# EAGLE board protoBoardHB (EAGLE 9.2.2)
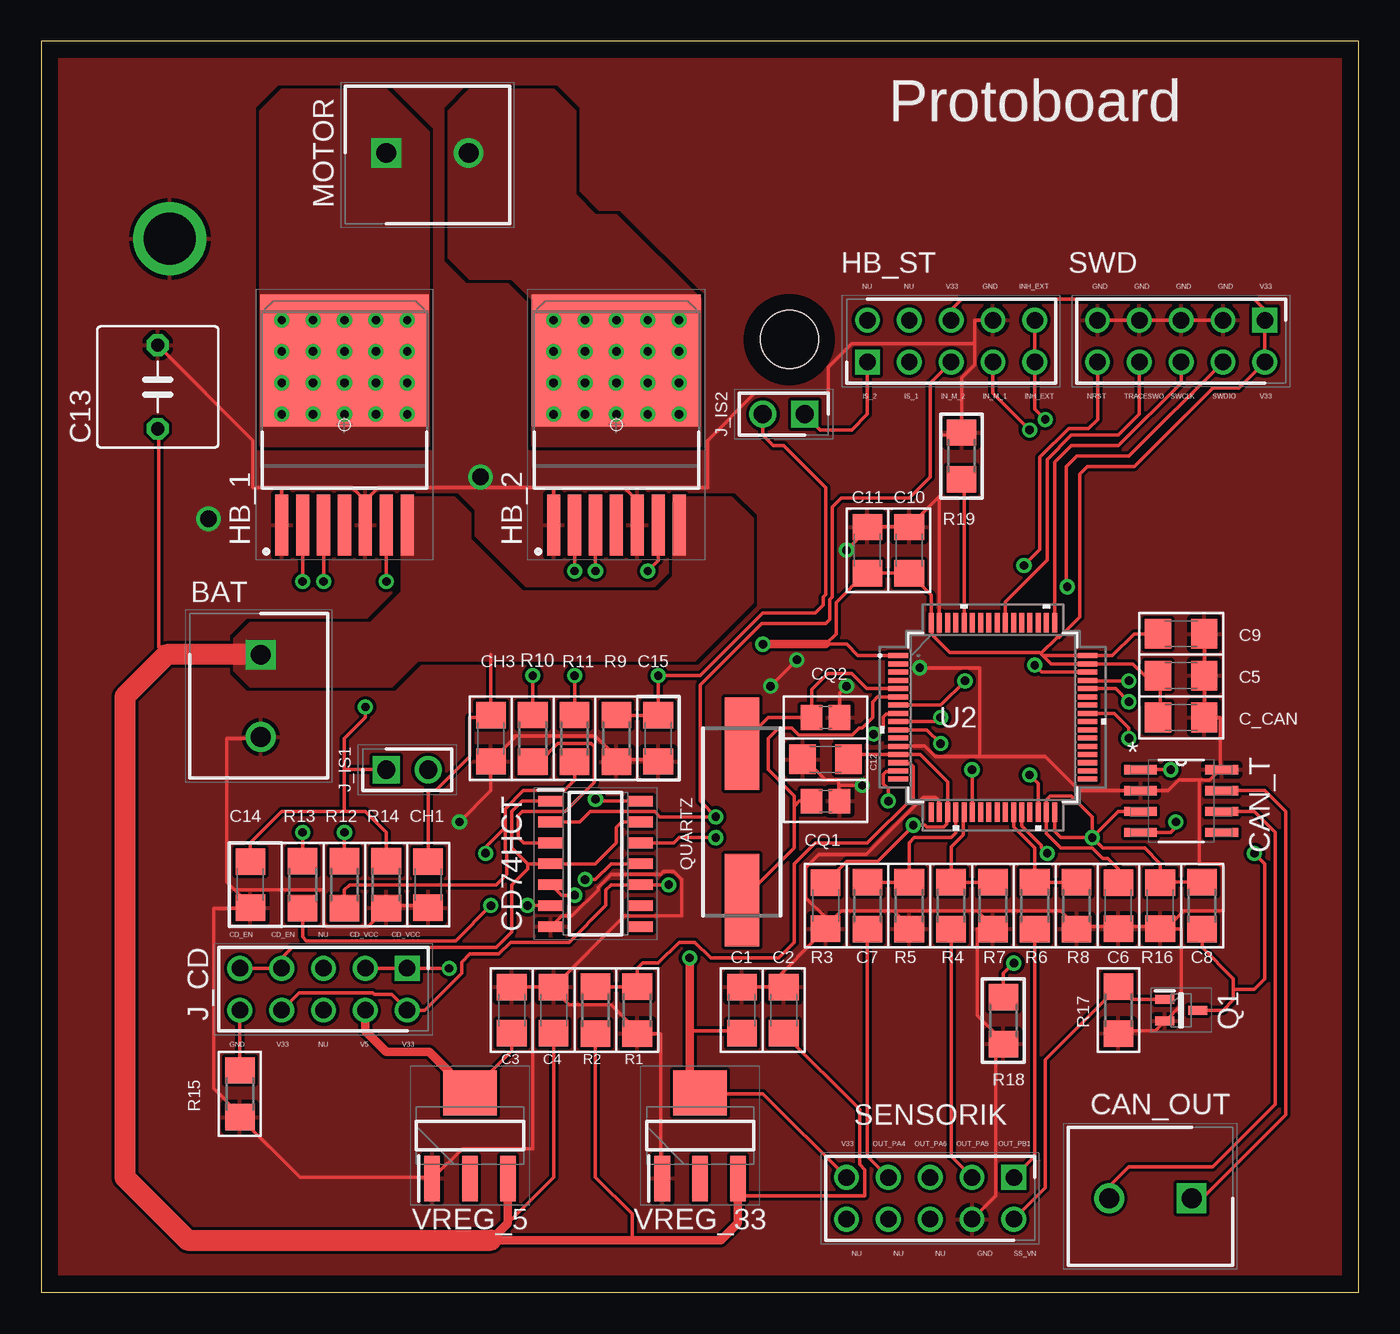
[diagram p0: board, top side]
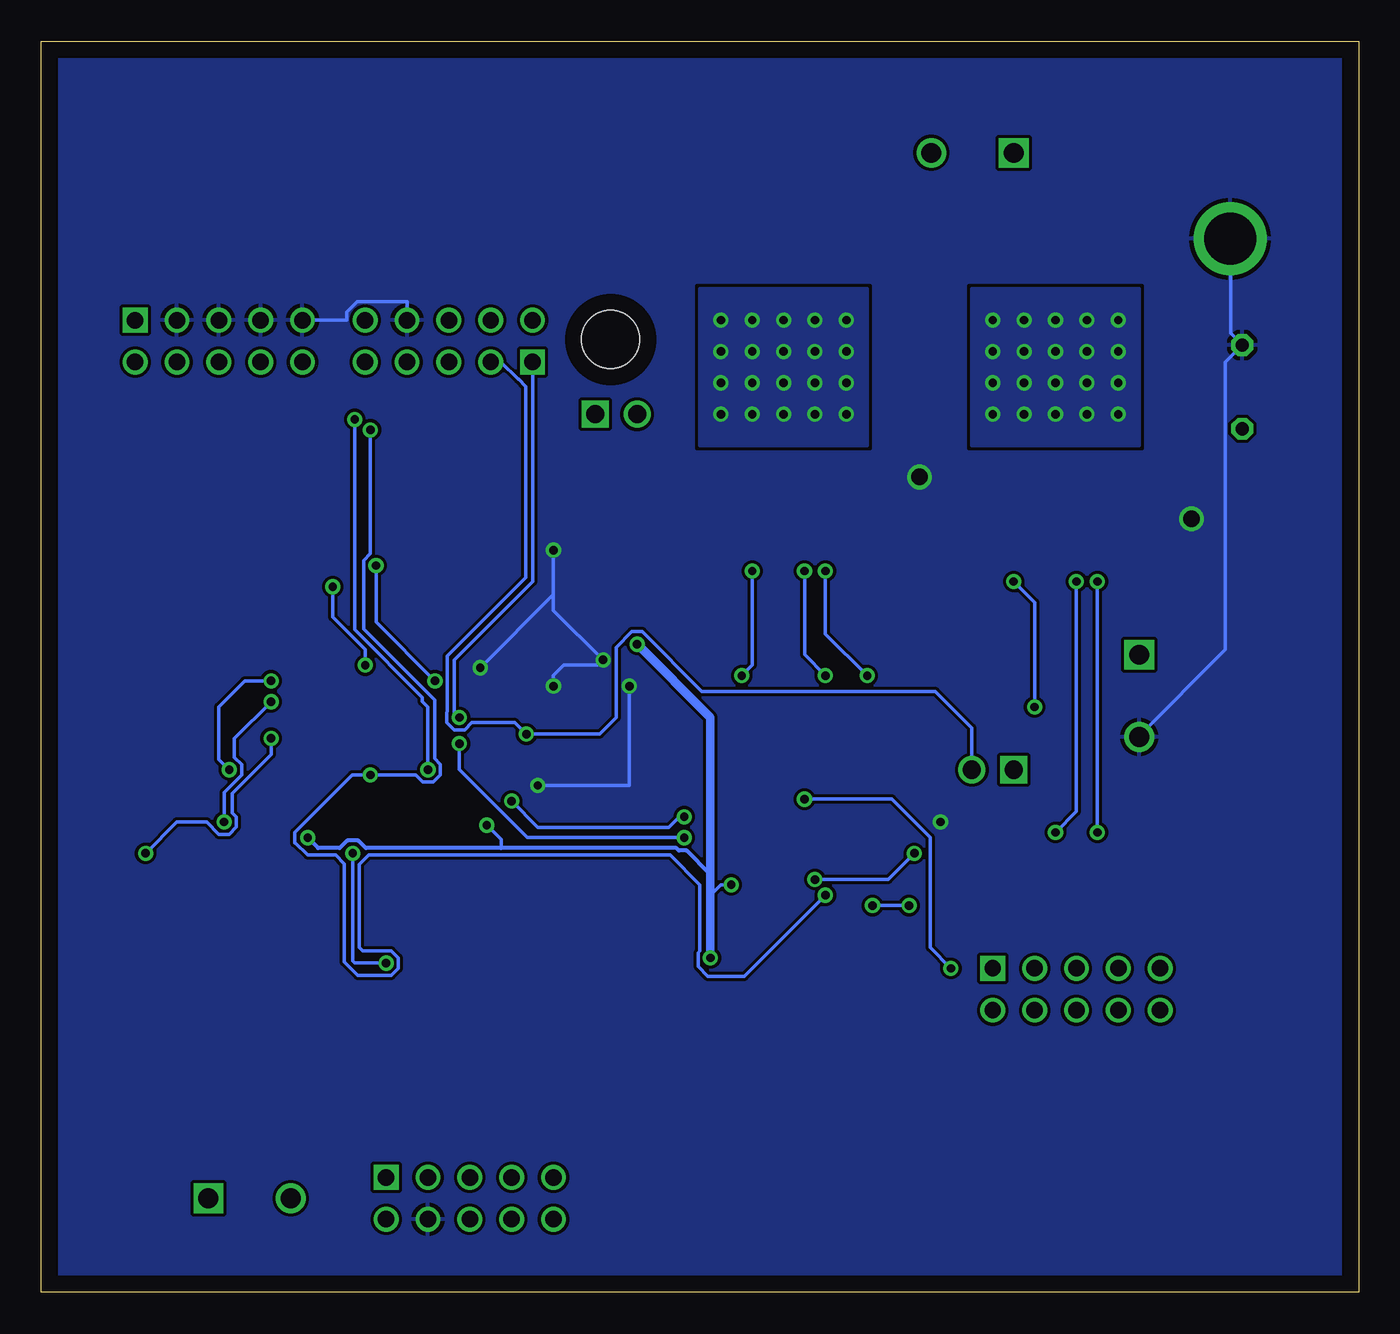
[diagram p1: board, bottom side, seen from below]

Size 80 x 76 mm. Coordinates in mm from the lower left corner, seen from the top.
Outline: 0,0 80,0 80,76 0,76 0,0
Copper layers (1*16): Top 0.07mm / dielectric 1.55mm / Bottom 0.07mm
Design rules "default *": minimum track width 6mil, minimum drill 0.35mm, track to track 0.19mm, track to pad 0.19mm, pad to pad 0.19mm, via to via 0.19mm, smd to smd 0.19mm, copper to edge 40mil, drill to drill 6mil, minimum pad ring 10mil, minimum via ring 8mil, stop-mask expansion 4mil, vias tented up to drill 0mil, thermal gap 10mil
Net classes: 0 default: width 0.2 mm, drill 0.508 mm; 1 V12: width 0.6 mm, drill 0.8 mm
Holes 3.5 mm at 45.43,57.88

## Footprints (pad centres in the part's own frame; a part is rotated, then mirrored left to right if it is on the bottom)
SHDR2W100P0X500_1X2_1000X820X1 = drill 1.2 pad 1.8 square: 1 0,0 | drill 1.2 pad 1.8: 2 5,0
C1206 = smd 1.6 x 1.8: 1 -1.4,0; 2 1.4,0
C050-075X075 = drill 0.813 octagon: 1 -2.54,0; 2 2.54,0
SOIC127P600X175-8N = smd 1.981 x 0.559: 1 -2.464,1.905; 2 -2.464,0.635; 3 -2.464,-0.635; 4 -2.464,-1.905; 5 2.464,-1.905; 6 2.464,-0.635; 7 2.464,0.635; 8 2.464,1.905
SOIC127P600X175-14N = smd 1.525 x 0.65: 1 -2.712,3.81; 2 -2.712,2.54; 3 -2.712,1.27; 4 -2.712,0; 5 -2.712,-1.27; 6 -2.712,-2.54; 7 -2.712,-3.81; 8 2.712,-3.81; 9 2.712,-2.54; 10 2.712,-1.27; 11 2.712,0; 12 2.712,1.27; 13 2.712,2.54; 14 2.712,3.81
C0805 = smd 1.3 x 1.5: 1 -0.85,0; 2 0.85,0
TO127P1500X440-8N = smd 3.7 x 0.8: 1 -6.1,3.81; 2 -6.1,2.54; 3 -6.1,1.27; 4 -6.1,0; 5 -6.1,-1.27; 6 -6.1,-2.54; 7 -6.1,-3.81 | smd 8 x 10.25: 8 3.9,0
HDRV10W80P254_2X5_1270X508X864 = drill 1 pad 1.5 square: 1 0,0 | drill 1 pad 1.5: 2 0,2.54; 3 2.54,0; 4 2.54,2.54; 5 5.08,0; 6 5.08,2.54; 7 7.62,0; 8 7.62,2.54; 9 10.16,0; 10 10.16,2.54
HDRV2W64P0X254_1X2_508X254X864 = drill 1.1 pad 1.65 square: 1 0,0 | drill 1.1 pad 1.65: 2 2.54,0
BEAGLEBONEBLACK_MOUNTING_HOLE = drill 3.175 pad 4.445: P$1 0,0
SOT65P220X100-3N = smd 1.15 x 0.55: 1 -1,0.65; 2 -1,-0.65; 3 1,0
ABLS-12.000MHZ-B2 = smd 5.6 x 2.1: 1 -4.75,0; 2 4.75,0
R1206 = smd 1.6 x 1.803: 1 -1.422,0; 2 1.422,0
LQFP64-10X10MM = smd 1.194 x 0.305: 1 -5.75,3.75; 2 -5.75,3.25; 3 -5.75,2.75; 4 -5.75,2.25; 5 -5.75,1.75; 6 -5.75,1.25; 7 -5.75,0.75; 8 -5.75,0.25; 9 -5.75,-0.25; 10 -5.75,-0.75; 11 -5.75,-1.25; 12 -5.75,-1.75; 13 -5.75,-2.25; 14 -5.75,-2.75; 15 -5.75,-3.25; 16 -5.75,-3.75; 33 5.75,-3.75; 34 5.75,-3.25; 35 5.75,-2.75; 36 5.75,-2.25; 37 5.75,-1.75; 38 5.75,-1.25; 39 5.75,-0.75; 40 5.75,-0.25; 41 5.75,0.25; 42 5.75,0.75; 43 5.75,1.25; 44 5.75,1.75; 45 5.75,2.25; 46 5.75,2.75; 47 5.75,3.25; 48 5.75,3.75 | smd 0.305 x 1.194: 17 -3.75,-5.75; 18 -3.25,-5.75; 19 -2.75,-5.75; 20 -2.25,-5.75; 21 -1.75,-5.75; 22 -1.25,-5.75; 23 -0.75,-5.75; 24 -0.25,-5.75; 25 0.25,-5.75; 26 0.75,-5.75; 27 1.25,-5.75; 28 1.75,-5.75; 29 2.25,-5.75; 30 2.75,-5.75; 31 3.25,-5.75; 32 3.75,-5.75; 49 3.75,5.75; 50 3.25,5.75; 51 2.75,5.75; 52 2.25,5.75; 53 1.75,5.75; 54 1.25,5.75; 55 0.75,5.75; 56 0.25,5.75; 57 -0.25,5.75; 58 -0.75,5.75; 59 -1.25,5.75; 60 -1.75,5.75; 61 -2.25,5.75; 62 -2.75,5.75; 63 -3.25,5.75; 64 -3.75,5.75
SOT230P700X180-4N = smd 2.75 x 0.95: 1 -2.6,2.3; 2 -2.6,0; 3 -2.6,-2.3 | smd 2.75 x 3.25: 4 2.6,0

## Placement (x,y rotation side)
BAT  282836-2  [SHDR2W100P0X500_1X2_1000X820X1]  13.34,38.73 270 top
C1  4.7uF  [C1206]  42.55,17.14 90 top
C2  1uF  [C1206]  45.09,17.14 90 top
C3  4.7uF  [C1206]  28.57,17.14 270 top
C4  1uF  [C1206]  31.11,17.14 270 top
C5  2.2uF  [C1206]  69.22,37.47 0 top
C6  2.2uF  [C1206]  65.41,23.5 270 top
C7  100nF  [C1206]  47.62,23.5 270 top
C8  100nF  [C1206]  67.94,23.5 270 top
C9  100nF  [C1206]  69.22,40.01 0 top
C10  100nF  [C1206]  52.7,45.09 90 top
C11  4.7nF  [C1206]  50.16,45.09 90 top
C12  100nF  [C1206]  47.62,32.38 180 top
C13  470uF  [C050-075X075]  7.08,55 90 top
C14  1nF  [C1206]  12.7,24.77 270 top
C15  1nF  [C1206]  37.47,33.66 270 top
C_CAN  100nF  [C1206]  69.22,34.92 0 top
CAN_OUT  282836-2  [SHDR2W100P0X500_1X2_1000X820X1]  69.85,5.71 180 top
CAN_T  SN65HVD230QD  [SOIC127P600X175-8N]  69.22,29.84 0 top
CD74HCT  CD74HCT125M  [SOIC127P600X175-14N]  33.66,26.04 0 top
CH1  0.47uF  [C1206]  23.5,24.77 270 top
CH3  0.47uF  [C1206]  27.3,33.66 270 top
CQ1  22pF  [C0805]  47.62,29.84 0 top
CQ2  22pF  [C0805]  47.62,34.92 0 top
HB_1  BTN8982TA  [TO127P1500X440-8N]  18.41,52.7 90 top
HB_2  BTN8982TA  [TO127P1500X440-8N]  34.92,52.7 90 top
HB_ST  M20-9980545  [HDRV10W80P254_2X5_1270X508X864]  50.16,56.52 0 top
J_CD  M20-9980545  [HDRV10W80P254_2X5_1270X508X864]  22.23,19.68 180 top
J_IS1  M20-9990246  [HDRV2W64P0X254_1X2_508X254X864]  20.95,31.75 0 top
J_IS2  M20-9990246  [HDRV2W64P0X254_1X2_508X254X864]  46.35,53.34 180 top
MGT1  BEAGLEBONEBLACK_MOUNTING_HOLE  [BEAGLEBONEBLACK_MOUNTING_HOLE]  7.81,64 0 top
MOTOR  282836-2  [SHDR2W100P0X500_1X2_1000X820X1]  20.95,69.22 0 top
Q1  SMMBT3904WT1G  [SOT65P220X100-3N]  69.22,17.14 0 top
QUARTZ  ABLS-8.000MHZ-K4T  [ABLS-12.000MHZ-B2]  42.55,28.57 90 top
R1  [R1206]  36.2,17.14 270 top
R2  [R1206]  33.66,17.14 90 top
R3  [R1206]  50.16,23.5 90 top
R4  [R1206]  52.7,23.5 270 top
R5  [R1206]  55.24,23.5 90 top
R6  [R1206]  57.78,23.5 270 top
R7  [R1206]  60.33,23.5 90 top
R8  [R1206]  62.87,23.5 270 top
R9  1k  [R1206]  34.92,33.66 90 top
R10  10K  [R1206]  29.84,33.66 90 top
R11  10K  [R1206]  32.38,33.66 90 top
R12  10K  [R1206]  18.41,24.77 90 top
R13  10K  [R1206]  15.88,24.77 90 top
R14  1k  [R1206]  20.95,24.77 90 top
R15  1K  [R1206]  12.06,12.06 90 top
R16  100K  [R1206]  70.48,23.5 270 top
R17  7.5K  [R1206]  65.41,17.14 270 top
R18  1k  [R1206]  58.42,16.51 90 top
R19  1k  [R1206]  55.88,50.8 270 top
SENSORIK  M20-9980545  [HDRV10W80P254_2X5_1270X508X864]  59.05,6.99 180 top
SWD  M20-9980545  [HDRV10W80P254_2X5_1270X508X864]  74.3,59.05 180 top
U2  STM32F4X5RG  [LQFP64-10X10MM]  57.78,34.92 0 top
VREG_5  LDL1117S50R  [SOT230P700X180-4N]  26.04,9.53 90 top
VREG_33  LDL1117S33R  [SOT230P700X180-4N]  40.01,9.53 90 top

## Library data of the parts
BAT CAN_OUT MOTOR = SamacSys_Parts; DESCRIPTION: TERMINAL BLOCK, PCB MOUNT, SIDE WIRE ENTRY, STACKING , 5.00mm PITCH; HEIGHT: 10.2mm; MANUFACTURER_NAME: TE Connectivity; MANUFACTURER_PART_NUMBER: 282836-2; MOUSER_PART_NUMBER: 571-2828362
C1-C15 C_CAN CH1 CH3 CQ1 CQ2 R1-R19 = adafruit
CAN_T = ADP_Components; MF: TEXAS INSTRUMENTS; MPN: SN65HVD230QD..; OC_FARNELL: 1648752; OC_NEWARK: 75C7746; PACKAGE: SOIC-8; SUPPLIER: Texas Instruments
CD74HCT = SamacSys_Parts; DESCRIPTION: High Speed CMOS Logic Quad Buffers with 3-State Outputs; HEIGHT: 1.75mm; MANUFACTURER_NAME: Texas Instruments; MANUFACTURER_PART_NUMBER: CD74HCT125M; MOUSER_PART_NUMBER: 595-CD74HCT125M
HB_1 HB_2 = SamacSys_Parts; DESCRIPTION: New Infineon BTN8982TA Motor Driver,, 7-Pin TO-263-7-1; HEIGHT: 4.4mm; MANUFACTURER_NAME: Infineon; MANUFACTURER_PART_NUMBER: BTN8982TA; MOUSER_PART_NUMBER: 726-BTN8982TA
HB_ST SWD = SamacSys_Parts; DESCRIPTION: M20 Header, Pin, Dil, Vertical, 5+5 W HARWIN M20 Series, 2.54mm Pitch 10 Way 2 Row Straight Pin Header, Through Hole, Solder Termination; HEIGHT: 8.64mm; MANUFACTURER_NAME: HARWIN; MANUFACTURER_PART_NUMBER: M20-9980545; MF: HARWIN; MOUSER_PART_NUMBER: 855-M20-9980545; MPN: M20-9980545; OC_FARNELL: 1022235
J_CD SENSORIK = SamacSys_Parts; DESCRIPTION: M20 Header, Pin, Dil, Vertical, 5+5 W HARWIN M20 Series, 2.54mm Pitch 10 Way 2 Row Straight Pin Header, Through Hole, Solder Termination; HEIGHT: 8.64mm; MANUFACTURER_NAME: HARWIN; MANUFACTURER_PART_NUMBER: M20-9980545; MOUSER_PART_NUMBER: 855-M20-9980545
J_IS1 J_IS2 = SamacSys_Parts; DESCRIPTION: HARWIN M20-9990246. Board-To-Board Connector, Straight, 2.54 mm, 2 Contacts, Header, M20 Series, Through Hole; HEIGHT: 8.64mm; MANUFACTURER_NAME: HARWIN; MANUFACTURER_PART_NUMBER: M20-9990246; MOUSER_PART_NUMBER: 855-M20-9990246
MGT1 = BeagleBone_Black_Wireless
Q1 = SamacSys_Parts; DESCRIPTION: ON SEMICONDUCTOR - SMMBT3904WT1G - TRANSISTOR, AEC-Q101, NPN, 40V, SOT-323; HEIGHT: 1mm; MANUFACTURER_NAME: ON Semiconductor; MANUFACTURER_PART_NUMBER: SMMBT3904WT1G; MOUSER_PART_NUMBER: 863-SMMBT3904WT1G
QUARTZ = SamacSys_Parts; DESCRIPTION: ABRACON - ABLS-8.000MHZ-K4T - CRYSTAL, 8MHZ, 18PF, HC-49US; HEIGHT: mm; MANUFACTURER_NAME: ABRACON; MANUFACTURER_PART_NUMBER: ABLS-8.000MHZ-K4T; MF: ABRACON; MOUSER_PART_NUMBER: 815-ABLS-8.0MK4-T; MPN: ABLS-8.000MHZ-K4T; OC_FARNELL: 2467758
U2 = ADP_Components; MANUFACTURER_PART_NUMBER: STM32F4X5RG; OC_FARNELL: unknown; VENDOR: STMicroelectronics
VREG_5 = SamacSys_Parts; DESCRIPTION: STMICROELECTRONICS - LDL1117S50R - LDO, FIXED, 5V, 1.2A, SOT-223-3; HEIGHT: 1.8mm; MANUFACTURER_NAME: STMicroelectronics; MANUFACTURER_PART_NUMBER: LDL1117S50R; MF: STMICROELECTRONICS; MOUSER_PART_NUMBER: 511-LDL1117S50R; MPN: LDL1117S50R; OC_FARNELL: 2729709
VREG_33 = SamacSys_Parts; DESCRIPTION: STMICROELECTRONICS - LDL1117S33R - LDO, FIXED, 3.3V, 1.2A, SOT-223-3; HEIGHT: 1.8mm; MANUFACTURER_NAME: STMicroelectronics; MANUFACTURER_PART_NUMBER: LDL1117S33R; MF: STMICROELECTRONICS; MOUSER_PART_NUMBER: 511-LDL1117S33R; MPN: LDL1117S33R; OC_FARNELL: 2729708

## Nets
BOOT0: R19.2 U2.60
BOOT1: R18.2 U2.28
CAN1_RX: CAN_T.4 U2.44
CAN1_TX: CAN_T.1 U2.45
CANH: CAN_OUT.1 CAN_T.7
CANL: CAN_OUT.2 CAN_T.6
CD_EN: CD74HCT.1 CD74HCT.4 CD74HCT.13 J_CD.7 J_CD.9
CD_VCC: CD74HCT.14 J_CD.1 J_CD.3
GND: BAT.2 C1.2 C2.2 C3.1 C4.1 C5.2 C6.2 C7.2 C8.2 C9.2 C10.2 C11.2 C12.2 C13.2 C14.2 C15.2 C_CAN.2 CAN_T.2 CAN_T.8 CD74HCT.7 CH1.2 CH3.2 CQ1.2 CQ2.2 HB_1.1 HB_1.5 HB_2.1 HB_2.5 HB_ST.8 MGT1.P$1 Q1.2 R1.2 R4.2 R6.2 R8.2 R9.1 R14.1 R15.1 R17.2 R18.1 R19.1 SENSORIK.4 SWD.3 SWD.5 SWD.7 SWD.9 U2.12 U2.18 U2.63 VREG_5.1 VREG_33.1
IN_1: CD74HCT.6 R13.1
IN_2: CD74HCT.3 R10.1
IN_M_1: CD74HCT.5 HB_ST.7 U2.30
IN_M_2: CD74HCT.2 HB_ST.5 U2.15
INH: CD74HCT.11 R11.1 R12.1
INH_EXT: HB_ST.9 HB_ST.10 U2.22
INH_M: CD74HCT.12 U2.10
IS_1: HB_ST.3 J_IS1.2 U2.8
IS_2: HB_ST.1 J_IS2.1 U2.9
N$1: J_CD.10 R15.2
N$2: C15.1 HB_2.6 J_IS2.2 R9.2
N$3: HB_1.2 R13.2
N$4: HB_1.3 R12.2
N$5: HB_2.2 R10.2
N$6: HB_2.3 R11.2
N$7: C14.1 HB_1.6 J_IS1.1 R14.2
N$8: HB_ST.2
N$9: HB_ST.4
N$15: SENSORIK.6
NRST: SWD.10 U2.7
OSC_IN: CQ2.1 QUARTZ.2 U2.5
OSC_OUT: CQ1.1 QUARTZ.1 U2.6
OUT_PA4: R3.1 SENSORIK.7
OUT_PA5: R5.1 SENSORIK.3
OUT_PA6: SENSORIK.5
OUT_PB1: R7.1 SENSORIK.1
PA0: R1.1 R2.2 U2.14
PA4: R3.2 R4.1 U2.20
PA5: R5.2 R6.1 U2.21
PA8: Q1.3 R16.2 U2.41
PB1: R7.2 R8.1 U2.27
SS_VN: Q1.1 R17.1 SENSORIK.2
SWCLK: SWD.6 U2.49
SWDIO: SWD.4 U2.46
TRACESWO: SWD.8 U2.55
V5: C3.2 J_CD.4 VREG_5.4
V12: BAT.1 C2.1 C4.2 C13.1 CH1.1 CH3.1 HB_1.7 HB_2.7 R2.1 VREG_5.3 VREG_33.3
V33: C1.1 C5.1 C6.1 C7.1 C8.1 C9.1 C10.1 C11.1 C12.1 C_CAN.1 CAN_T.3 CD74HCT.10 HB_ST.6 J_CD.2 J_CD.8 R16.1 SENSORIK.9 SWD.1 SWD.2 U2.1 U2.13 U2.19 U2.31 U2.32 U2.47 U2.48 U2.64 VREG_33.4
V_MOT_MIN: HB_2.8 MOTOR.2
V_MOT_PL: HB_1.8 MOTOR.1

## Tracks (layer width: path | path; a pad name or v marks a point on that pad's centre or on a via)
BOOT0
  Top 0.203: R19.2 56.03,49.22 U2.60
BOOT1  (via drill 0.51)
  Top 0.203: U2.28 59.53,28.35 60.73,27.16 60.73,27.03 v61.08,26.67 | v59.05,20 58.42,19.37 R18.2
  Bottom 0.203: v61.08,26.67 61.08,20.13 60.96,20 v59.05,20
CAN1_RX  (via drill 0.51)
  Top 0.203: U2.44 65.24,36.67 v66.04,35.88 | v68.9,28.57 68.9,28.26 68.58,27.94 CAN_T.4
  Bottom 0.203: v66.04,35.88 68.26,33.66 68.26,32.51 67.82,32.06 67.82,31.44 68.9,30.36 v68.9,28.57
CAN1_TX  (via drill 0.51)
  Top 0.203: CAN_T.1 v68.58,31.75 | U2.45 63.58,37.13 66.02,37.13 v66.04,37.15
  Bottom 0.203: v68.58,31.75 69.22,32.38 69.22,35.56 67.63,37.15 v66.04,37.15
CANH
  Top 0.203: CAN_T.7 74.3,30.48 75.56,29.21 75.56,10.79 70.48,5.71 CAN_OUT.1
CANL
  Top 0.203: CAN_T.6 73.66,29.21 74.93,27.94 74.93,11.43 71.12,7.62 66.04,7.62 64.77,6.35 64.77,5.79 CAN_OUT.2
CD_EN
  Top 0.203: 29.53,26.04 CD74HCT.4 33.66,26.04 34.92,27.3 34.92,28.26 35.24,28.57 CD74HCT.13 | 29.53,26.04 28.57,26.99 28.57,29.21 29.21,29.84 CD74HCT.1 | J_CD.9 J_CD.7 14.61,20.32 15.24,20.95 27.62,20.95 28.57,21.91 28.57,24.77 29.53,25.72 29.53,26.04
CD_VCC  (via drill 0.51)
  Top 0.2: J_CD.1 J_CD.3
  Top 0.203: CD74HCT.14 33.77,29.84 v33.66,29.96 | v24.77,19.68 J_CD.1
  Bottom 0.203: v33.66,29.96 28.37,29.96 26.04,27.62 26.04,20.95 v24.77,19.68
GND  (via drill 0.51, 1)
  Top 0.2: 70.64,37.47 70.64,34.92 | 70.64,37.47 70.64,40.01 C9.2 | 70.64,37.47 C5.2 | 71.6,31.75 71.6,34.92 70.64,34.92 | 70.64,34.92 C_CAN.2 | 56.99,32.54 60.96,32.54 63.02,30.48 CAN_T.2 68.42,30.48 69.06,31.11 70.33,31.11 | 56.99,32.54 54.29,32.54 53.66,33.18 52.07,33.18 U2.12 | 71.6,31.75 70.96,31.11 70.33,31.11 | 71.6,31.75 CAN_T.8 | R17.2 65.41,15.88 67.63,15.88 68.1,16.35 Q1.2 68.26,16.51 69.22,17.46 69.22,22.07 68.26,22.07 | 62.87,22.23 65.41,22.23 | 65.41,22.23 67.94,22.23 C8.2 | 65.41,22.23 C6.2 | 68.26,22.07 67.94,22.07 C8.2 | 44.13,18.57 45.09,18.57 C2.2 | 44.13,18.57 42.55,18.57 C1.2 | 44.13,18.57 47.62,22.07 C7.2 47.62,22.23 48.58,23.18 51.75,23.18 | 51.75,23.18 52.7,22.23 R4.2 | 56.83,23.18 57.78,22.23 R6.2 56.83,22.07 56.83,16.83 58.42,15.24 R18.1 57.94,15.08 57.94,5.87 SENSORIK.4 | 51.75,23.18 56.83,23.18 | 62.87,22.23 61.91,23.18 56.83,23.18 | 62.87,22.23 R8.2 | 70.33,31.11 70.33,26.04 71.6,26.04 71.75,25.88 71.75,23.18 69.37,23.18 68.26,22.07 | 68.26,22.07 C8.2 | SWD.9 SWD.7 SWD.5 SWD.3 | 48.42,30.8 48.42,31.11 47.62,31.11 46.35,32.38 C12.2 | 48.42,30.8 48.42,29.84 CQ1.2 | 52.7,46.51 50.16,46.51 C11.2 50.16,46.35 v48.9,45.09 | 56.67,57.63 56.67,59.05 HB_ST.8 | 56.67,57.63 56.67,56.36 55.88,55.56 R19.1 55.88,52.07 54.61,52.07 54.61,48.42 54.53,48.34 52.7,46.51 | 52.7,46.51 C10.2 | v49.85,30.8 48.42,30.8 | v45.88,38.42 v44.29,36.83 | 31.11,18.57 35.4,22.86 38.89,22.86 38.89,25.08 38.42,25.56 37.78,25.56 37.62,25.4 34.61,25.4 33.81,24.61 33.81,24.45 32.23,22.86 31.59,22.86 30.96,22.23 CD74HCT.7 | 31.11,18.57 29.84,18.57 | 29.84,18.57 28.57,18.57 C3.1 | 31.11,18.57 C4.1 31.11,18.41 32.07,17.46 34.61,17.46 36.2,15.88 R1.2 37.62,15.72 37.62,6.99 VREG_33.1
  Top 0.2: CH1.2 23.5,23.5 20.95,23.5 R14.1 19.84,22.23 17.3,22.23 17.14,22.38 17.14,24.45 11.75,24.45 | 11.75,24.45 11.27,24.92 11.27,33.66 13.34,33.66 BAT.2 | 11.75,24.45 12.7,23.5 C14.2 12.7,23.34 10.48,23.34 10.48,12.38 12.06,10.79 R15.1 15.72,6.99 23.65,6.99 VREG_5.1 23.81,6.99 25.56,8.73 29.84,8.73 29.84,18.57 | 14.61,48.9 HB_1.1 | 14.61,48.9 18.89,48.9 19.68,48.1 | 19.68,48.1 HB_1.5 19.68,46.67 | 28.73,33.81 33.66,33.81 34.92,32.54 34.92,32.38 | 34.92,32.38 37.47,32.38 C15.2 | 34.92,32.38 R9.1 | 31.11,48.9 HB_2.1 | 35.4,48.9 31.11,48.9 | 35.4,48.9 36.2,48.1 HB_2.5 | 19.68,48.1 20.48,48.9 31.11,48.9 | 14.61,48.9 12.86,48.9 12.86,51.75 7.14,57.47 C13.2 | 56.67,57.63 49.21,57.63 47.78,56.2 47.78,54.61 43.34,54.61 40.48,51.75 40.48,48.9 35.4,48.9 | 56.99,32.54 56.99,37.94 v53.34,37.94
  Top 0.203: U2.18 54.49,29.22 54.49,29.9 54.31,30.07 53.57,30.07 50.09,26.59 47.2,26.59 46.42,25.82 46.42,23.97 47.62,22.77 47.62,22.23 | CQ2.2 48.48,36.41 v48.9,36.83 | U2.63 54.53,48.34 | v25.4,28.57 27.3,30.48 CH3.2 28.73,33.68 28.73,33.81
  Bottom 0.2: v49.85,30.8 44.29,30.8 v44.29,36.83 | v45.88,38.42 48.9,41.43 48.9,42.39 | v48.9,45.09 48.9,42.39 | SWD.9 61.44,59.05 61.44,59.53 60.8,60.17 57.78,60.17 HB_ST.8 | MGT1.P$1 7.78,63.98 7.78,58.26 7.14,57.63 C13.2 7.14,57.47 8.1,56.52 8.1,39.05 13.34,33.81 BAT.2 | 48.9,42.39 v53.34,37.94
  Bottom 0.203: v48.9,36.83 48.9,37.47 48.26,38.1 46.2,38.1 v45.88,38.42
  other vias: 10.16,46.99 26.67,49.53
  pour Top (rank 2): -1.27,77.47 -1.27,-1.27 80.01,-1.27 80.01,77.47
  pour Bottom (rank 2): -1.27,78.74 -1.27,-1.27 80.01,-1.27 80.01,77.47 80.01,78.74
IN_1  (via drill 0.51)
  Top 0.203: CD74HCT.6 v29.53,23.5 | v27.3,23.5 25.17,21.36 16.11,21.36 15.88,21.59 R13.1
  Bottom 0.203: v29.53,23.5 v27.3,23.5
IN_2
  Top 0.203: R10.1 30.26,32.23 31.36,33.34 33.41,33.34 33.59,33.16 33.59,30.98 31.83,29.22 29.22,29.22 28.98,28.98 28.98,27.62 29.3,27.3 CD74HCT.3
IN_M_1  (via drill 0.51)
  Top 0.2: v32.38,24.13 31.59,24.13 30.96,24.77 CD74HCT.5
  Top 0.203: HB_ST.7 57.78,54.61 v60.01,52.39 | v60.01,31.43 60.53,30.91 U2.30
  Bottom 0.2: v32.38,24.13 37.31,19.21 | 64.61,27.3 64.61,27.94 61.12,31.43 v60.01,31.43
  Bottom 0.203: v60.01,52.39 60.01,44.89 60.43,44.47 60.43,40.3 56.12,35.99 56.12,32.43 55.76,32.06 55.76,31.44 56.2,30.99 56.83,30.99 57.27,31.43 v60.01,31.43 | 37.31,19.21 39.53,19.21 40.12,19.8 40.12,20.63 40.01,20.74 40.01,24.77 41.81,26.57 60.13,26.57 60.69,26 60.69,20.95 60.49,20.75 58.74,20.75 58.31,20.31 58.31,19.69 58.74,19.25 60.77,19.25 61.59,20.08 61.59,26.04 62.13,26.57 63.82,26.57 64.56,27.3 64.61,27.3
IN_M_2  (via drill 0.51)
  Top 0.203: U2.15 51.99,31.63 51.31,31.63 51.14,31.45 51.14,30.9 51.44,30.6 v51.44,29.84 | CD74HCT.2 32.7,28.57 33.33,29.2 37.25,29.2 37.56,28.89 v40.96,28.89 40.01,29.84 40.01,36.9 43.75,40.64 47.62,40.64 47.87,40.88 47.87,42.07 48.03,42.23 48.03,47.71 48.58,48.26 52.7,48.26 53.98,49.53 53.98,55.24 HB_ST.5
  Bottom 0.203: v51.44,29.84 49.85,28.26 41.91,28.26 41.27,28.89 v40.96,28.89
INH  (via drill 0.51)
  Top 0.203: CD74HCT.11 34.61,26.04 33.66,25.08 v33.02,25.08 | R12.1 18.41,24.45 18.73,24.77 27.62,24.77 28.26,25.4 28.26,26.73 28.17,26.82 28.17,28.26 | 28.17,28.26 28.17,29.38 29.27,30.48 31.75,30.48 32.38,31.11 R11.1 | v26.99,26.67 26.99,27.07 28.17,28.26
  Bottom 0.203: v33.02,25.08 28.57,25.08 v26.99,26.67
INH_EXT  (via drill 0.51)
  Top 0.203: HB_ST.10 HB_ST.9 60.33,53.66 v60.96,53.02 | v56.52,31.75 56.52,29.2 U2.22
  Bottom 0.203: v60.96,53.02 60.96,40.26 56.85,36.15 56.85,35.88 56.52,35.55 v56.52,31.76 v56.52,31.75
INH_M  (via drill 0.51)
  Top 0.203: U2.10 53.77,34.17 v54.61,33.34 | v40.96,27.62 38.73,27.62 38.42,27.3 CD74HCT.12
  Bottom 0.203: v54.61,33.34 54.61,31.75 50.48,27.62 v40.96,27.62
IS_1  (via drill 0.51)
  Top 0.203: v50.54,33.91 50.77,33.91 51.14,34.28 51.14,34.95 51.31,35.13 51.99,35.13 U2.8
  Bottom 0.203: J_IS1.2 23.5,34.29 25.72,36.51 39.88,36.51 43.5,40.13 44.13,40.13 45.09,39.17 45.09,34.92 46.1,33.91 v50.54,33.91 51.24,34.61 53.85,34.61 54.3,34.17 54.92,34.17 55.37,34.61 55.37,35.24 55.33,35.28 55.33,38.65 50.57,43.41 50.57,55.01 51.01,55.46 51.04,55.46 52.1,56.52 HB_ST.3
IS_2  (via drill 0.51)
  Top 0.203: U2.9 54.36,34.67 v54.61,34.92 | J_IS2.1 47.31,52.39 49.21,52.39 50.16,53.34 HB_ST.1
  Bottom 0.203: v54.61,34.92 54.93,35.24 54.93,38.42 50.16,43.18 HB_ST.1
N$1
  Top 0.203: J_CD.10 R15.2
N$2  (via drill 0.51)
  Top 0.203: HB_2.6 37.47,44.45 v36.83,43.81 | R9.2 34.95,35.05 C15.1 v37.47,37.47 40.01,37.47 43.81,41.27 46.99,41.27 47.47,41.76 47.47,42.24 47.62,42.39 47.62,48.9 45.09,51.44 44.45,51.44 43.81,52.07 J_IS2.2
  Bottom 0.203: v36.83,43.81 36.83,38.1 v37.47,37.47
N$3  (via drill 0.51)
  Top 0.203: HB_1.2 v15.88,43.18 | v15.88,27.94 R13.2
  Bottom 0.203: v15.88,43.18 v15.88,27.94
N$4  (via drill 0.51)
  Top 0.203: HB_1.3 v17.14,43.18 | v18.41,27.94 R12.2
  Bottom 0.203: v17.14,43.18 17.14,29.21 v18.41,27.94
N$5  (via drill 0.51)
  Top 0.203: HB_2.2 v32.38,43.81 | v29.84,37.47 R10.2
  Bottom 0.203: v32.38,43.81 32.38,40.01 v29.84,37.47
N$6  (via drill 0.51)
  Top 0.203: R11.2 v32.38,37.47 | v33.66,43.81 HB_2.3
  Bottom 0.203: v32.38,37.47 33.66,38.73 v33.66,43.81
N$7  (via drill 0.51)
  Top 0.203: 18.41,31.75 18.41,33.66 19.68,34.92 v19.68,35.56 | 18.41,31.75 18.41,29.21 | 18.41,29.21 14.61,29.21 12.7,27.3 C14.1 | R14.2 20.95,27.94 19.68,29.21 18.41,29.21 | 18.41,31.75 J_IS1.1 | v20.95,43.18 HB_1.6
  Bottom 0.203: v19.68,35.56 19.68,41.91 v20.95,43.18
NRST  (via drill 0.51)
  Top 0.203: v56.09,37.15 54.63,35.68 54.3,35.68 54.29,35.67 U2.7 | SWD.10 64.14,53.02 63.59,52.47 62.38,52.47 60.63,50.73 60.63,45.12 v59.67,44.15
  Bottom 0.203: v56.09,37.15 59.67,40.73 v59.67,44.15
OSC_IN
  Top 0.203: QUARTZ.2 44.15,34.92 CQ2.1 46.77,36.62 47.75,37.59 49.21,37.59 50.12,36.67 U2.5
OSC_OUT
  Top 0.203: QUARTZ.1 45.72,27 45.72,29.53 | 45.72,29.53 46.04,29.84 CQ1.1 | 45.72,29.53 45.72,30.16 44.13,31.75 44.13,33.66 44.77,34.29 45.58,34.29 46,33.87 49.25,33.87 49.67,34.29 49.85,34.29 50.48,34.92 50.48,35.88 50.8,36.2 50.82,36.17 U2.6
OUT_PA4
  Top 0.203: R3.1 50.16,8.26 SENSORIK.7
OUT_PA5
  Top 0.203: R5.1 55.24,8.26 SENSORIK.3
OUT_PB1
  Top 0.203: R7.1 60.33,8.26 SENSORIK.1
PA0
  Top 0.203: U2.14 52.08,32.13 52.76,32.13 52.93,31.95 52.93,30.07 50.16,27.3 46.99,27.3 45.72,26.04 45.72,21.27 44.77,20.32 40.64,20.32 39.69,21.27 38.73,21.27 37.47,20 36.51,20 36.2,19.68 R1.1 R2.2
PA4
  Top 0.203: U2.20 55.53,27.91 55.24,27.62 53.02,27.62 52.7,27.3 R4.1 R3.2
PA5
  Top 0.203: U2.21 55.99,29.13 55.99,27.8 55.24,27.05 R5.2 R6.1
PA8  (via drill 0.51)
  Top 0.203: R16.2 70.48,20.95 72.39,19.05 72.39,18.41 | 72.39,18.41 72.39,17.78 71.75,17.14 Q1.3 | U2.41 65.16,35.17 66.04,34.29 v66.04,33.66 | v73.66,26.67 74.3,26.04 74.3,19.05 73.66,18.41 72.39,18.41
  Bottom 0.203: v66.04,33.66 66.04,32.66 68.4,30.3 68.4,29.14 68.15,28.89 68.15,28.27 68.59,27.83 69.21,27.83 69.96,28.57 71.75,28.57 v73.66,26.67
PB1
  Top 0.203: U2.27 59.03,28.28 60.33,26.99 R7.2 R8.1
SS_VN
  Top 0.203: SENSORIK.2 60.96,6.35 60.96,14.12 R17.1 66.18,17.8 Q1.1
SWCLK
  Top 0.203: SWD.6 69.22,55.24 65.41,51.44 62.55,51.44 61.53,50.42 U2.49
SWDIO  (via drill 0.51)
  Top 0.203: SWD.4 66.04,50.8 62.87,50.8 62.23,50.16 62.23,42.93 v62.29,42.86 | U2.46 60.75,37.67 v60.33,38.1
  Bottom 0.203: v62.29,42.86 62.29,41.02 60.33,39.05 v60.33,38.1
TRACESWO
  Top 0.203: U2.55 58.53,41.95 61.08,44.48 61.08,50.6 62.55,52.07 65.41,52.07 66.67,53.34 SWD.8
V5
  Top 0.203: VREG_5.4 28.57,14.66 C3.2
  Top 0.508: VREG_5.4 23.55,14.61 20.95,14.61 19.68,15.88 J_CD.4
V12
  Top 0.2: CH1.1 23.5,30.48 23.97,30.48 26.04,32.54 26.04,34.92 27.3,34.92 CH3.1 | C2.1 45.09,15.72 49.69,11.11 49.69,7.78 50.01,7.46 50.01,5.87 42.55,5.87 VREG_33.3 | C13.1 7.14,52.39 7.14,39.21 7.3,39.21 7.62,38.73
  Top 0.203: CH3.1 27.3,38.73 | 28.34,4.21 31.11,6.99 C4.2 | R2.1 33.66,6.99 35.88,4.76 35.88,3.17
  Top 0.508: VREG_5.3 28.34,4.21 27.3,3.17 35.88,3.17 41.27,3.17 42.3,4.21 VREG_33.3
  Top 1.27: BAT.1 7.62,38.73 5.08,36.2 5.08,6.99 8.89,3.17 27.3,3.17
  pour Top (isolate 0.025, no thermals): 21.91,48.26 21.91,42.55 20,40.64 12.7,40.64 11.75,39.69 11.75,37.78 12.7,36.83 21.27,36.83 22.86,38.42 39.69,38.42 43.18,41.91 43.18,46.99 41.91,48.26 38.73,48.26 38.42,47.94 38.42,43.5 37.47,42.55 29.21,42.55 26.04,45.72 26.04,47.31 25.08,48.26
V33  (via drill 0.51)
  Top 0.2: 39.37,15.88 42.55,15.88 C1.1 | C7.1 47.62,24.92 48.9,26.19 50.8,26.19 52.86,28.26 v52.95,28.38 | C_CAN.1 67.94,34.92 67.94,37.47 C5.1 | 67.94,24.92 R16.1 | SENSORIK.9 43.81,12.06 40.16,12.06 VREG_33.4
  Top 0.203: U2.1 49.59,38.67 48.9,39.37 47.62,39.37 48.26,40.01 48.26,41.91 50.03,43.69 C11.1 C10.1 54.03,42.35 U2.64 54.08,40.63 54.08,39.95 55.17,38.86 60.64,38.86 60.7,38.8 | v63.82,27.62 65.41,29.21 CAN_T.3 | v63.82,27.62 61.91,27.62 61.53,28 U2.32 | v63.82,27.62 64.45,26.99 66.99,26.99 67.94,26.04 67.94,24.92 C8.1 | v63.82,27.62 63.82,28.89 62.55,30.16 61.28,30.16 61.03,29.92 U2.31 61.03,27.86 61.91,26.99 63.82,26.99 64.45,26.35 64.77,26.35 65.41,25.72 C6.1 | 60.7,38.8 60.82,38.67 | 60.82,38.67 U2.48 65.03,38.67 66.36,40.01 C9.1 | 60.82,38.67 61.32,38.17 U2.47 66.28,38.17 66.99,37.47 C5.1 | 60.7,38.8 61.68,39.78 61.81,39.78 63.05,41.02 63.05,49.72 63.5,50.16 66.36,50.16 71.12,54.93 72.71,54.93 SWD.2 SWD.1 74.3,59.69 73.66,60.33 55.88,60.33 55.24,59.69 HB_ST.6 | C12.1 49.31,32.67 U2.13 53.37,32.67 55.03,31.01 U2.19 54.99,29.13 54.99,28.45 54.81,28.28 53.76,28.28 53.65,28.38 v52.95,28.38 | v38.1,24.77 CD74HCT.10 34.61,24.77 34.29,24.45 34.29,23.5 32.07,21.27 28.51,21.27 27.79,20.55 26.04,20.55 25.52,20.04 25.52,19.37 23.3,17.14 J_CD.2 21.27,18.1 20.23,18.1 20.12,18.2 15.66,18.2 J_CD.8
  Top 0.508: VREG_33.4 39.37,12.76 39.37,15.88 v39.37,20.32 | v43.81,39.37 47.62,39.37
  Bottom 0.203: v52.95,28.38 52.07,27.5 52.07,26.99 | v38.1,24.77 38.73,24.77 39.37,24.13
  Bottom 0.254: 39.37,25.4 40.81,26.84 41.28,26.84 41.43,26.99 52.07,26.99 60.29,26.99 60.76,27.45 61.41,27.45 61.88,26.99 63.18,26.99 v63.82,27.62
  Bottom 0.508: v39.37,20.32 39.37,24.13 39.37,25.4 39.37,34.92 v43.81,39.37
V_MOT_MIN  (via drill 0.51)
  other vias: 31.11,59.05 33.02,59.05 34.92,59.05 36.83,59.05 38.73,59.05 38.73,57.15 36.83,57.15 34.92,57.15 33.02,57.15 31.11,57.15 31.11,55.24 33.02,55.24 34.92,55.24 36.83,55.24 38.73,55.24 38.73,53.34 36.83,53.34 34.92,53.34 33.02,53.34 31.11,53.34
  pour Top (isolate 0.025, no thermals): 26.04,73.03 24.77,71.75 24.77,62.87 26.04,61.59 28.57,61.59 29.84,60.33 29.84,51.44 40.01,51.44 40.01,60.33 34.92,65.41 33.66,65.41 32.38,66.67 32.38,71.75 31.11,73.03
  pour Bottom: 29.84,60.96 29.84,51.44 40.01,51.44 40.01,60.96
V_MOT_PL  (via drill 0.51)
  other vias: 14.61,59.05 16.51,59.05 18.41,59.05 20.32,59.05 22.23,59.05 22.23,57.15 20.32,57.15 18.41,57.15 16.51,57.15 14.61,57.15 14.61,55.24 16.51,55.24 18.41,55.24 20.32,55.24 22.23,55.24 22.23,53.34 20.32,53.34 18.41,53.34 16.51,53.34 14.61,53.34
  pour Top (isolate 0.025, no thermals): 20.95,73.03 23.5,70.48 23.5,51.44 13.34,51.44 13.34,71.75 14.61,73.03
  pour Bottom: 13.34,60.96 13.34,51.44 23.5,51.44 23.5,60.96

## Text on the board
tPlace: Protoboard | NU | NU | V33 | GND | INH_EXT | GND | GND | GND | GND | V33 | IS_2 | IS_1 | IN_M_2 | IN_M_1 | INH_EXT | NRST | TRACESWO | SWCLK | SWDIO | V33 | CD_EN | CD_EN | NU | CD_VCC | CD_VCC | GND | V33 | NU | V5 | V33 | V33 | OUT_PA4 | OUT_PA6 | OUT_PA5 | OUT_PB1 | NU | NU | NU | GND | SS_VN